# Altium PCB PCB-Support-STM32F407-2layers-Poyl-VIA-EMI.PcbDoc (part 2 of 3)
Units mm, origin at the board's own origin, x right, y up, seen from the top; angles counter-clockwise.
Board outline 200 x 110 mm, 2 copper layers (Top Layer, Bottom Layer), stack 1.569 mm thick; 103 components, 128 nets, 450 pads, 633 vias.
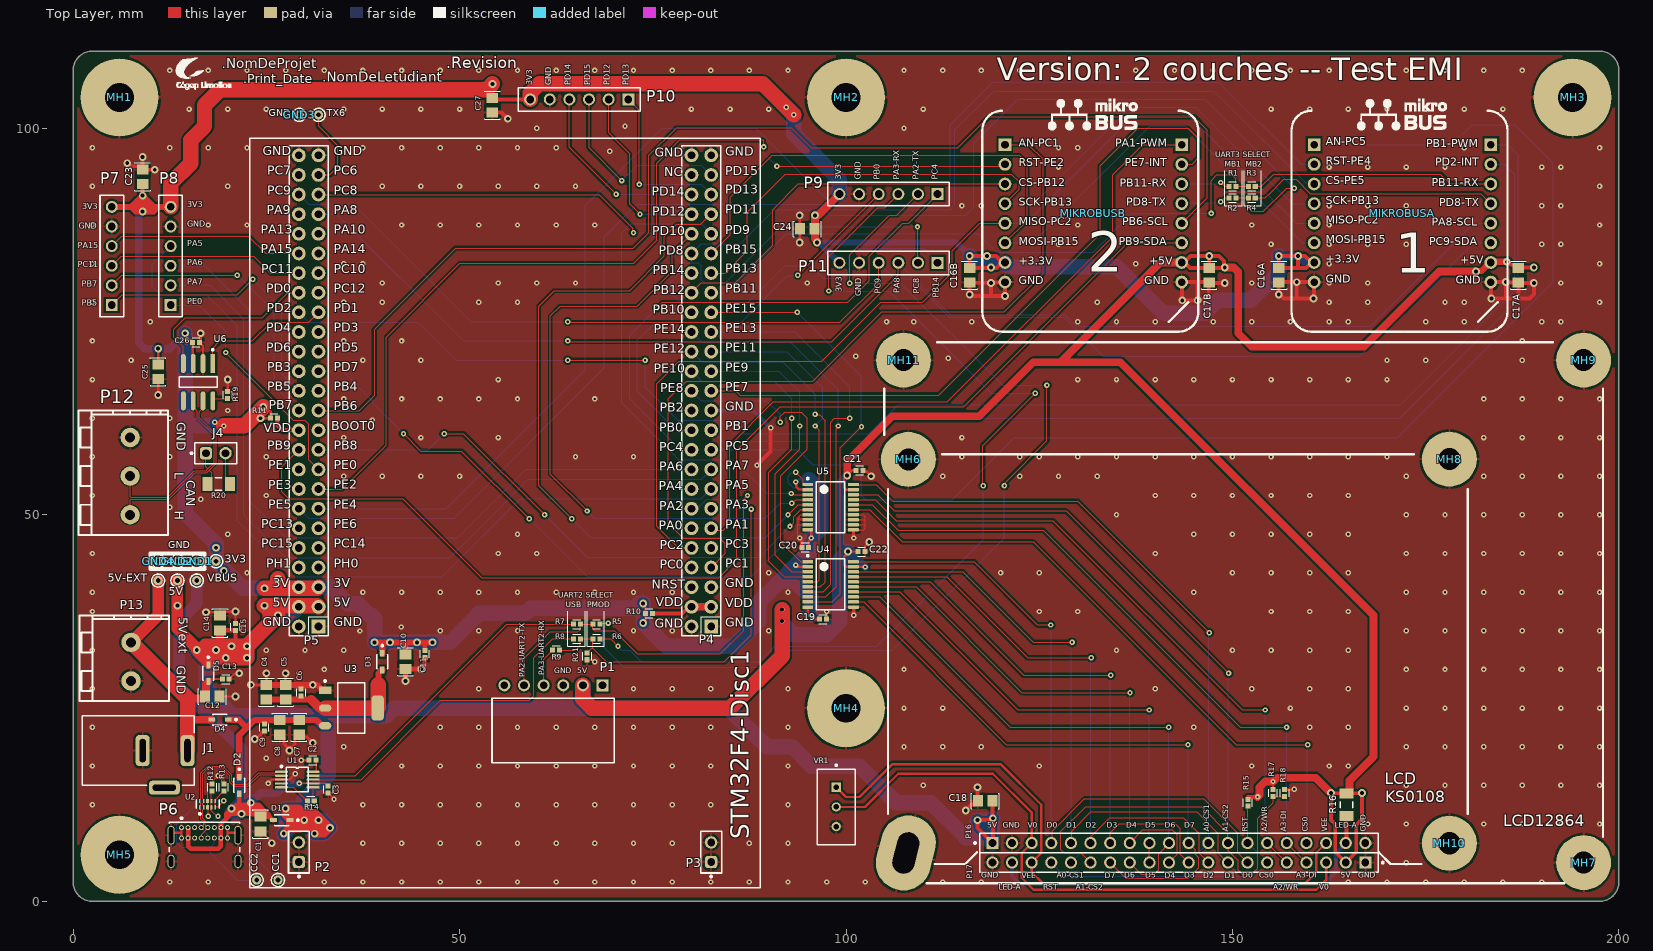
[diagram p0: Top Layer view]

## Via types
v1: diameter 0.7, hole 0.3, Top Layer to Bottom Layer, tented both sides, 539 vias
v2: diameter 1, hole 0.5, Top Layer to Bottom Layer, tented both sides, 92 vias
v3: diameter 0.6, hole 0.52, Top Layer to Bottom Layer, tented both sides, 2 vias

## Nets (pads, with @x,y where several pads share a name; then routed paths per layer and width w, separated by ;. In a path a pad name is that pad's centre, name@x,y a point inside that pad or via, vN(x,y) a via of type N, cw(c..) or ccw(c..) an arc to the next point about the centre after c; other vN are vias at no path point) (continued)
PB11/UART3-RX: (continued)
  Bottom Layer w0.15: P4.35@82.55,78.74 84.599,78.74 92.252,86.393 117.107,86.393 119.5,84 132,84 137,89 v1(147.25,89)
PB12/CS: MIKROBUSB.3 P4.36 | length 49.1
  Top Layer w0.15: P4.36@80.01,78.74 81.27,80 85.639,80 90.5,84.861 90.5,89.5 93.81,92.81 MIKROBUSB.3@120.57,92.81
PB13/SPI2-SCK: MIKROBUSA.4 MIKROBUSB.4 P4.37 | length 102.4
  Top Layer w0.15: P4.37@82.55,81.28 84.377,81.28 87.246,84.149 87.246,89.181 92.124,94.058 121.41,94.058 122.396,93.071 122.396,92.096 MIKROBUSB.4@120.57,90.27
  Bottom Layer w0.15: MIKROBUSB.4@120.57,90.27 124.27,90.27 136.75,102.75 145.25,102.75 157.73,90.27 MIKROBUSA.4@160.57,90.27
PB14/D2: P4.38 P11.1 | length 45.8
  Bottom Layer w0.15: P4.38@80.01,81.28 78.448,81.28 77.307,80.139 77.307,78.693 78.5,77.5 87.356,77.5 92.106,82.25 95.441,82.25 97.065,80.625 99.52,80.625 100.418,81.523 100.418,83.491 101.389,84.462 109.998,84.462 P11.1@111.85,82.61
PB15/SPI2-MOSI: MIKROBUSA.6 MIKROBUSB.6 P4.39 | length 113.5
  Top Layer w0.15: P4.39@82.55,83.82 85,86.27 85,91.061 90.489,96.549 122.385,96.549 123.457,95.477 123.457,88.077 MIKROBUSB.6@120.57,85.19
  Bottom Layer w0.15: MIKROBUSB.6@120.57,85.19 124.19,85.19 139.371,100.371 143.826,100.371 159.006,85.19 MIKROBUSA.6@160.57,85.19
PC1/ADC123-IN11: MIKROBUSB.1 P4.7 | length 104.1
  Top Layer w0.15: P4.7@82.55,43.18 84.407,45.037 84.407,46.238 83.676,46.968 78.965,46.968 77,48.934 77,65 79.302,67.302 95.675,67.302 104.628,76.255 120.505,76.255 125.5,81.25 125.5,96 123.61,97.89 MIKROBUSB.1@120.57,97.89
PC2/SPI2-MISO: MIKROBUSA.5 MIKROBUSB.5 P4.10 | length 131
  Top Layer w0.15: P4.10@80.01,45.72 78.28,45.72 75.5,48.5 75.5,66.964 78.388,69.852 96.878,69.852 104.526,77.5 109.904,77.5 113.773,81.369 113.773,84.177 117.326,87.73 MIKROBUSB.5@120.57,87.73
  Bottom Layer w0.15: MIKROBUSB.5@120.57,87.73 123.287,87.73 137.248,101.691 144.309,101.691 158.27,87.73 MIKROBUSA.5@160.57,87.73
PC4/D0: P4.20 P9.1 | length 68.3
  Top Layer w0.15: v1(75.5,76.75) 76.25,77.5 100.232,77.5 103,80.268 103,83.438 107.312,87.75 108.1,87.75 P9.1@111.85,91.5
  Bottom Layer w0.15: v1(75.5,76.75) 72,73.25 72,65 78.58,58.42 P4.20@80.01,58.42

## Text inside footprints (layer, text, board x,y; h text height)
MIKROBUSA: Top Overlay "1" at 171.045,79.58 h8.89; Top Overlay "PB1-PWM" at 175.079,97.202 h1.78; Top Overlay "AN-PC5" at 162.08,97.439 h1.78; Top Overlay "+5V" at 179.487,82.075 h1.78; Top Overlay "GND" at 178.896,79.509 h1.78; Top Overlay "PD8-TX" at 176.738,89.565 h1.78; Top Overlay "PB11-RX" at 175.764,92.095 h1.78; Top Overlay "PD2-INT" at 176.229,94.752 h1.78; Top Overlay "PA8-SCL" at 175.808,87.005 h1.78; Top Overlay "GND" at 162.08,79.659 h1.78; Top Overlay "+3.3V" at 162.08,82.199 h1.78; Top Overlay "MOSI-PB15" at 162.08,84.739 h1.78; Top Overlay "SCK-PB13" at 162.08,89.819 h1.78; Top Overlay "MISO-PC2" at 162.08,87.279 h1.78; Top Overlay "CS-PE5" at 162.08,92.359 h1.78; Top Overlay "RST-PE4" at 162.08,94.899 h1.78; Top Overlay "PC9-SDA" at 175.487,84.496 h1.78
MIKROBUSB: Top Overlay "PB9-SDA" at 135.28,84.524 h1.78; Top Overlay "RST-PE2" at 122.345,94.684 h1.78; Top Overlay "CS-PB12" at 122.345,92.144 h1.78; Top Overlay "MISO-PC2" at 122.345,87.064 h1.78; Top Overlay "SCK-PB13" at 122.345,89.604 h1.78; Top Overlay "MOSI-PB15" at 122.345,84.524 h1.78; Top Overlay "+3.3V" at 122.345,81.984 h1.78; Top Overlay "GND" at 122.345,79.444 h1.78; Top Overlay "PB6-SCL" at 135.763,87.064 h1.78; Top Overlay "PE7-INT" at 136.098,94.684 h1.78; Top Overlay "PB11-RX" at 135.42,92.089 h1.78; Top Overlay "PD8-TX" at 136.286,89.604 h1.78; Top Overlay "GND" at 138.62,79.444 h1.78; Top Overlay "+5V" at 139.204,81.984 h1.78; Top Overlay "AN-PC1" at 122.345,97.224 h1.78; Top Overlay "PA1-PWM" at 134.835,97.224 h1.78; Top Overlay "2" at 131.295,79.678 h8.89